# Altium PCB design2.PcbDoc
Units mil, origin at the board's own origin, x right, y up, seen from the top; angles counter-clockwise.
Board outline 866.14 x 3937.01 mil, 2 copper layers (Top Layer, Bottom Layer); 63 components, 38 nets, 188 pads, 34 vias.
Unrouted connection lines stored in the file: 83.
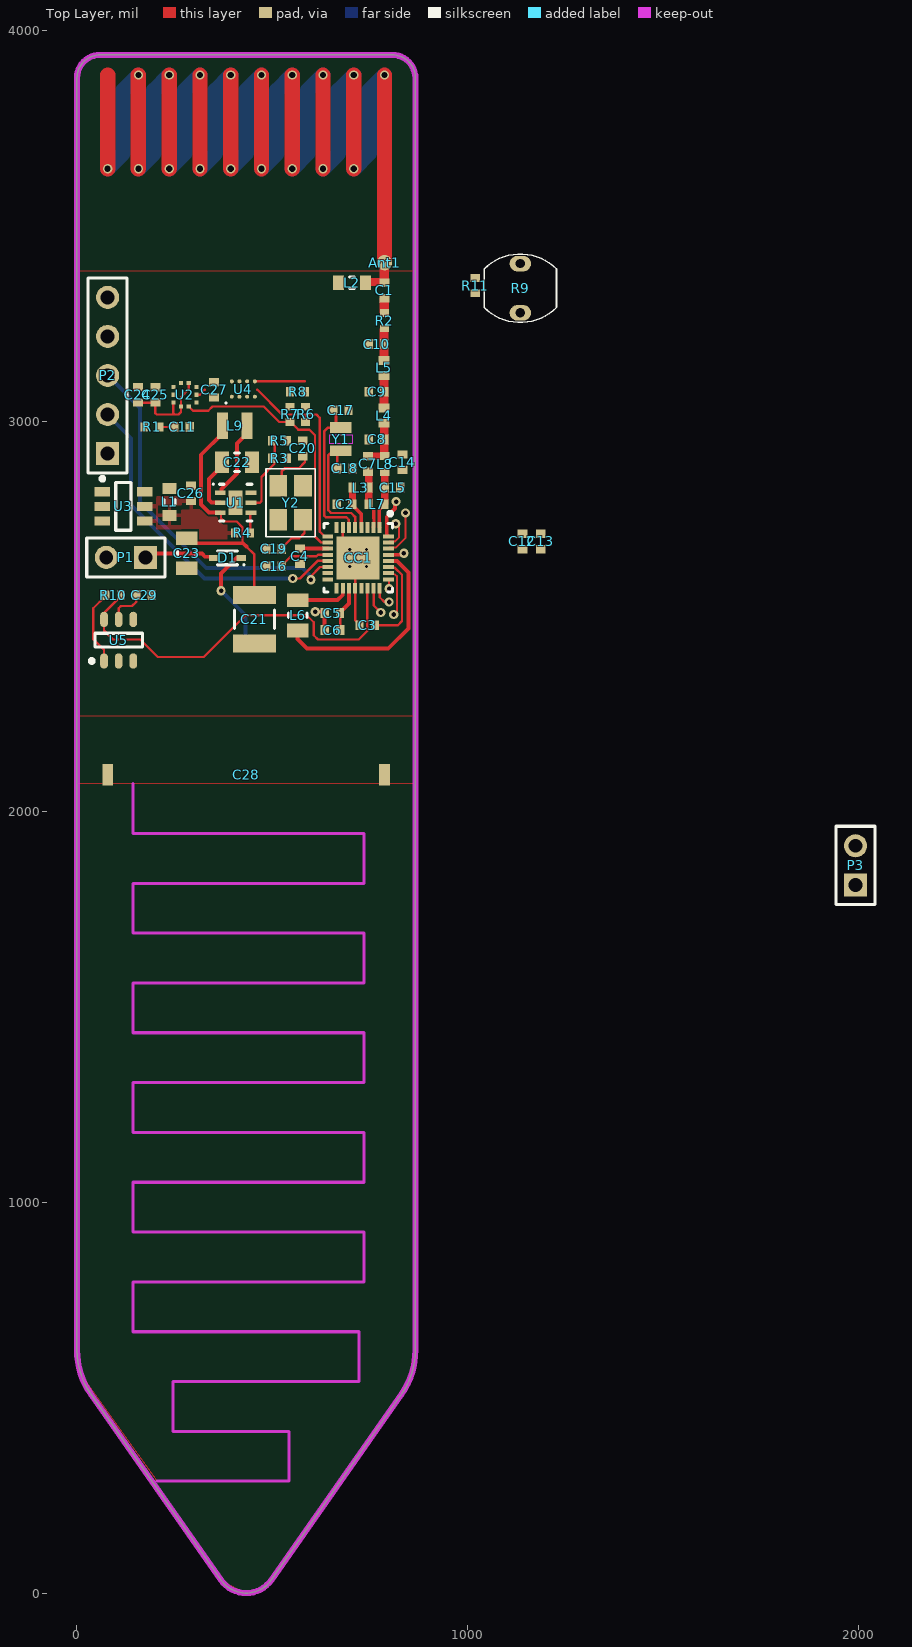
[diagram p0: Top Layer view]
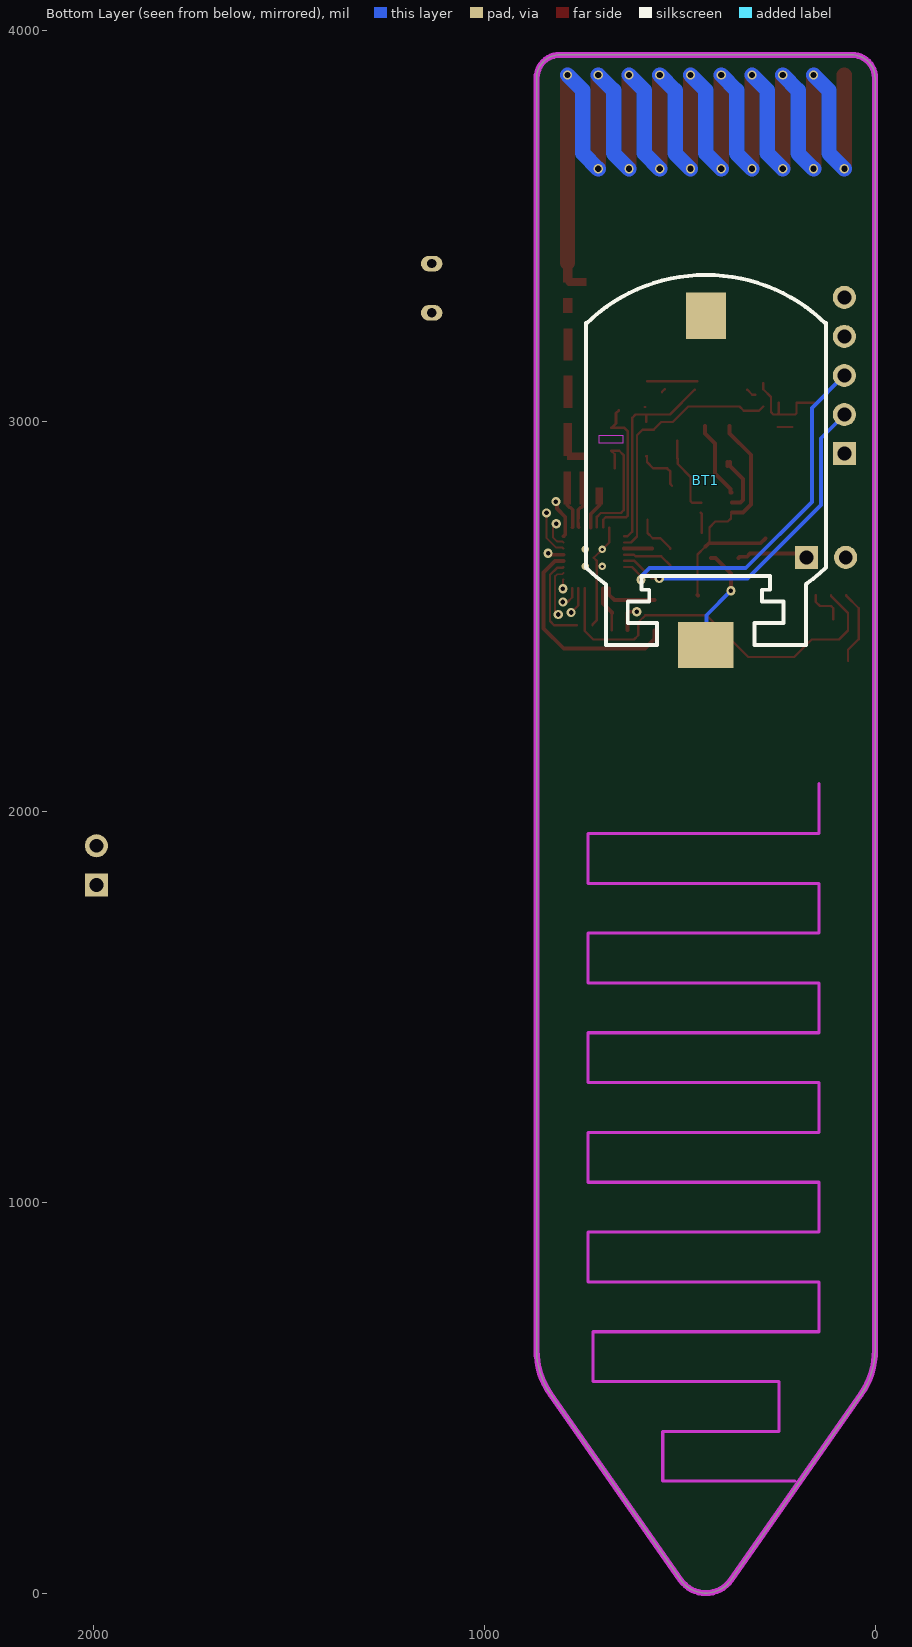
[diagram p1: Bottom Layer view, seen from below]
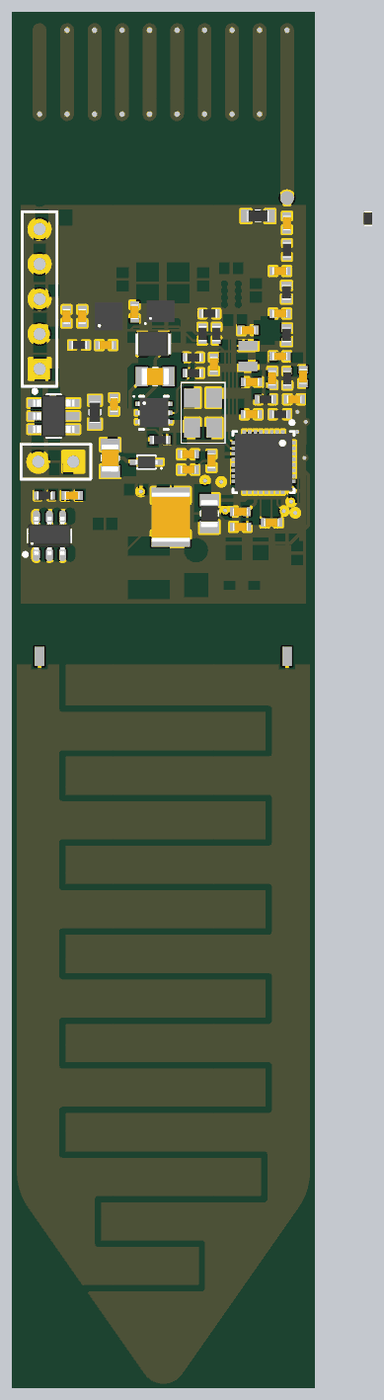
[diagram p2: 3D render of the assembled board from above, using the file's embedded part models]

## Layer stack, top to bottom
Top Solder: solder mask 0.4, Solder Resist, Dk 3.5
Top Layer: signal copper 1.4
Dielectric 1: dielectric 12.6, FR-4, Dk 4.8
Bottom Layer: signal copper 1.4
Bottom Solder: solder mask 0.4, Solder Resist, Dk 3.5

## Board outline
35.85,509.36 cw(c197.1,622.27) 0.25,622.27 0.25,3878.2 cw(c59.31,3878.2) 59.31,3937.26 807.34,3937.26 cw(c807.34,3878.2) 866.39,3878.2 866.39,622.27 cw(c669.54,622.27) 830.79,509.36 497.82,33.83 cw(c433.32,78.99) 368.82,33.83

## Design rules (kind name [scope] priority, off if disabled: settings)
Clearance [All] p1: gap=5 ignorepadtopadclearanceinfootprint=FALSE
DiffPairsRouting [All] p1: maxlimit=5 minlimit=5 mostfreqgap=5 toplayer_minwidth=8.58 toplayer_maxwidth=8.58 toplayer_prefwidth=8.58 bottomlayer_minwidth=8.58 bottomlayer_maxwidth=8.58 bottomlayer_prefwidth=8.58 maxuncoupledlength=500
Height Height_1 [InComponent('U2')] p1: minheight=0 maxheight=3937.01 prefheight=500
Height [All] p2: minheight=0 maxheight=1000 prefheight=500
HoleSize [All] p1: absolutevalues=TRUE maxlimit=100 minlimit=11.81 maxpercent=80.000 minpercent=20.000
PlaneClearance [All] p1: clearance=5
PlaneConnect [All] p1: planeconnectstyle=Direct reliefexpansion=20 reliefentries=4 reliefconductorwidth=10 reliefairgap=10
PolygonConnect [All] p1: connectstyle=Relief reliefconductorwidth=10 reliefentries=4 polygonreliefangle="90 Angle" airgapwidth=10
RoutingVias [All] p1: holewidth=15.75 width=27.56 viastyle="Through Hole" minholewidth=11.81 minwidth=23.62 maxholewidth=19.68 maxwidth=31.5
SolderMaskExpansion [All] p1: expansion=5
Width Width_50ohm [InNet('NetAnt1_1')] p1: maxlimit=39.37 minlimit=11.55 preferedwidth=11.55 minimp=50.000000 maximp=50.000000 favimp=50.000000
Width [All] p2: maxlimit=10 minlimit=5 preferedwidth=6 minimp=50.000000 maximp=50.000000 favimp=50.000000
25 further rules are at their usual default settings.

## Classes and differential pairs
differential pair RF: +RF_P -RF_N

## Components (designator, comment, footprint, x,y, rotation, side; value= is the part's Value field where it differs from the comment)
Ant1 "Antenna 868 Helix" ANTENNA_868_HELIX 787.4,3405.51 r180 top
BT1 "Battery Coin Cell" S8421-45R 433,2488.19 r180 bottom
C1 "Cap" "0402 (CAP)" 787,3334.31 r90 top value=8.2pF
C2 "Cap" "0402 (CAP)" 685,2787 r0 top value=100pF
C3 "Cap" "0402 (CAP)" 743.1,2477.5 r0 top value=100nF
C4 "Cap" "0402 (CAP)" 571,2654 r90 top value=100nF
C5 "Cap" "0402 (CAP)" 653.69,2508.52 r0 top value=22uF
C6 "Cap" "0402 (CAP)" 654,2465 r0 top value=100nF
C7 "Cap" "0402 (CAP)" 745,2890.39 r90 top value=3.6pF
C8 "Cap" "0402 (CAP)" 767,2953 r180 top value=2.7pF
C9 "Cap" "0402 (CAP)" 767,3075 r180 top value=6.2pF
C10 "Cap" "0402 (CAP)" 767,3197 r180 top value=3pF
C11 "Cap" "0402 (CAP)" 269.07,2985 r0 top value=100nF
C12 "Cap" "0402 (CAP)" 1140.3,2692.01 r270 top value=22uF
C13 "Cap" "0402 (CAP)" 1187.07,2692.01 r270 top value=100nF
C14 "Cap" "0402 (CAP)" 833.31,2895 r270 top value=100nF
C15 "Cap" "0402 (CAP)" 808,2830 r0 top value=3.6pF
C16 "Cap" "0402 (CAP)" 504.31,2628.35 r0 top value=1uF
C17 "Cap" "0402 (CAP)" 675.69,3027.55 r180 top value=12pF
C18 "Cap" "0402 (CAP)" 686,2879 r180 top value=12pF
C19 "DNM" "0402 (CAP)" 504.31,2672.62 r0 top value=12pF
C20 "DNM" "0402 (CAP)" 578,2930 r270 top value=12pF
C21 "GRM32EC70J107ME15L" "1210 (CAP)" 454.39,2492.63 r90 top value=100uF
C22 "Cap" "0805 (CAP)" 410,2895 r180 top value=22uF
C23 "Cap" "0805 (CAP)" 280.78,2661.74 r90 top value=10uF
C24 "Cap" "0402 (CAP)" 156,3067 r270 top value=100nF
C25 "Cap" "0402 (CAP)" 201,3067 r270 top value=100nF
C26 "Cap" "0402 (CAP)" 292,2815 r270 top value=1uF
C27 "Cap" "0402 (CAP)" 351,3080 r270 top value=100nF
C28 "Chumidity" SOIL_CAP 433.07,669.29 r0 top value=1pF
C29 "Cap" "0402 (CAP)" 171.88,2554.47 r180 top value=100nF
CC1 "CC1310F32RSMR" CC1310F32RSMR 720,2650 r270 top
D1 "RB751S40T5G" SOD-523 385,2650 r180 top
L1 "BLM18HE152SN1D" "0603 (IND)" 237,2793 r90 top value="1500 Ohm"
L2 "Inductor" "0603 (IND)" 704,3354 r180 top value=68nH
L3 "Inductor" "0402 (IND)" 725.57,2830 r180 top value=7.5nH
L4 "Inductor" LQW15AN6N8G00D 786,3014 r270 top value=6.8nH
L5 "Inductor" LQW15AN6N8G00D 786,3136 r270 top value=6.8nH
L6 "MLZ2012N6R8LT000" "0805 (IND)" 565,2503 r270 top value=6.8uH
L7 "Inductor" "0402 (IND)" 767,2787 r0 top value=27nH
L8 "Inductor" "0402 (IND)" 788,2890 r270 top value=7.5nH
L9 "Inductor" SRN2009T 404,2988 r0 top value=3.3uH
P1 "Header 2" HDR1X2 175.29,2651.16 r180 top
P2 "Header 5" HDR1X5 78.74,2916.71 r90 top
P3 "Header 2" HDR1X2 1993,1813 r90 top
R1 "Res1" "0402 (RES)" 192,2985 r180 top value=4.7K
R2 "DNM" "0402 (RES)" 787,3257 r270 top value=0
R3 "DNM" "0402 (RES)" 518.39,2904.79 r180 top value=0
R4 "Res1" "0402 (RES)" 423.84,2713.67 r0 top value=10K
R5 "DNM" "0402 (RES)" 518.39,2949.79 r0 top value=0
R6 "Res1" "0402 (RES)" 585.31,3017.39 r90 top value=4.7K
R7 "Res1" "0402 (RES)" 545.31,3017.39 r90 top value=4.7K
R8 "Res1" "0402 (RES)" 565,3075 r180 top value=4.7K
R9 "200K - 10K" Photoresistor 1135,3340 r90 top
R10 "Rcharge" "0402 (RES)" 93.14,2554.47 r0 top value=1k
R11 "Res1" "0402 (RES)" 1019.32,3346.65 r90 top value=4.7K
U1 "TPS61291" TPS61291 406.13,2791.16 r0 top
U2 "BMP388, Pressure sensor" BMP388 276.47,3067.31 r180 top
U3 "TPS22860" SOT23-5 119.23,2781.67 r0 top
U4 "HDC1010, Humidity, Temp" HDC1010 426,3082 r90 top
U5 "74LVC2G14, Inverting Schmitt Trigger" 74LVC2G14 106.88,2439.17 r90 top
Y1 "32.768 kHz" "FC-12M 32.7680KA-A3" 675.69,2953.84 r270 top
Y2 "TSX-3225 24.0000MF20G-AC3" "TSX-3225 24.0000MF20G-AC3" 547,2791 r90 top

## Footprints (in the part's own frame and the unit in brackets; to place one, negate y for a bottom-side part, rotate by r counter-clockwise, add the part's x,y. Pads: shape width x height; smd on the part's side, far side on the other; paste and mask are expansions set on the pad)
74LVC2G14 [mm] "TSOP, 6-Leads, Body 2,90x1,50mm, Pitch 0,95mm, IPC Medium Density"
  oval 1x0.5 smd: 1(-1.35,0.95) 2(-1.35,0) 3(-1.35,-0.95) 4(1.35,-0.95) 5(1.35,0) 6(1.35,0.95)
  silkscreen extent -1.47,-1.55 0.45,1.87, body extent -1.38,-1.55 1.38,1.55, height 1.1
"0402 (CAP)" [mm] "Chip Capacitor, 2-Leads, Body 1,60x0,80mm, IPC Medium Density"
  rect 0.54x0.64 smd: 1(-0.5,0) 2(0.5,0)
  body extent -0.55,-0.3 0.55,0.3, height 0.4
"0402 (IND)" [mm] "Chip Inductor, 2-Leads, Body 1,00x0,50mm, IPC Medium Density"
  rect 0.51x0.64 smd: 1(-0.525,0) 2(0.525,0)
  body extent -0.55,-0.3 0.55,0.3, height 0.4
"0402 (RES)" [mm] "Chip Resistor, 2-Leads, Body 1,00x0,50mm, IPC Medium Density"
  rect 0.5x0.6 smd: 1(-0.5,0) 2(0.5,0)
  body extent -0.55,-0.3 0.55,0.3, height 0.4
"0603 (IND)" [mm]
  rect 0.72x0.94 smd: 1(-0.87,0) 2(0.87,0)
  silkscreen extent -0.15,-0.37 0.15,0.37, body extent -0.8,-0.4 0.8,0.4, height 0.6
"0805 (CAP)" [mm] "Chip Capacitor, 2-Leads, Body 2,00x1,25mm, IPC Medium Density"
  rect 0.9x1.4 smd: 1(-0.975,0) 2(0.975,0)
  silkscreen extent -0.15,-0.6 0.15,0.6, body extent -1,-0.63 1,0.63, height 0.6
"0805 (IND)" [mm] "Chip Inductor, 2-Leads, Body 2,00x1,25mm, IPC Medium Density"
  rect 0.9x1.39 smd: 1(-0.98,0) 2(0.98,0)
  silkscreen extent -0.15,-0.6 0.15,0.6, body extent -1,-0.63 1,0.63, height 0.6
"1210 (CAP)" [mm] "Chip Capacitor, 2-Leads, Body 3,20x2,50mm, IPC Medium Density"
  rect 1.15x2.8 smd: 1(-1.575,0) 2(1.575,0)
  silkscreen extent -0.6,-1.3 0.6,1.3, body extent -1.8,-1.4 1.8,1.4, height 2.8
ANTENNA_868_HELIX [mm]
  round 1 smd: 1(0,0)
  Top Layer lines w1: 18,-6.1 18,-12.2 ; 16,-6.1 16,-12.2 ; 14,-6.1 14,-12.2 ; 12,-6.1 12,-12.2 ; 10,-6.1 10,-12.2 ; 8,-6.1 8,-12.2 ; 6,-6.1 6,-12.2 ; 4,-6.1 4,-12.2 ; 2,-6.1 2,-12.2 ; 0,0 0,-12.2
  Bottom Layer lines w1: 18,-6.1 17,-7.1 17,-11.2 16,-12.2 ; 16,-6.1 15,-7.1 15,-11.2 14,-12.2 ; 14,-6.1 13,-7.1 13,-11.2 12,-12.2 ; 12,-6.1 11,-7.1 11,-11.2 10,-12.2 ; 10,-6.1 9,-7.1 9,-11.2 8,-12.2 ; 8,-6.1 7,-7.1 7,-11.2 6,-12.2 ; 6,-6.1 5,-7.1 5,-11.2 4,-12.2 ; 4,-6.1 3,-7.1 3,-11.2 2,-12.2 ; 2,-6.1 1,-7.1 1,-11.2 0,-12.2
BMP388 [mm] "LGA, 10-Leads, Body 2,00x2,00mmx0,80mm, Pitch 0,50mm"
  rect 0.275x0.275 smd: 1(0.25,0.762) 2(-0.25,0.762) 3(-0.75,0.5) 4(-0.75,0) 5(-0.75,-0.5) 6(-0.25,-0.763) 7(0.25,-0.763) 8(0.75,-0.5) 9(0.75,0) 10(0.75,0.5)
  body extent -1.02,-1.03 1.65,1.02, height 30
CC1310F32RSMR [mm] "QFN, 32-Leads, Body 4,00x4,00mm, Pitch 0,40mm, Thermal Pad 2,80x2,80mm, IPC Medium Density"
  rect 0.7x0.26 smd: 1(-1.975,1.4) 2(-1.975,1) 3(-1.975,0.6) 4(-1.975,0.2) 5(-1.975,-0.2) 6(-1.975,-0.6) 7(-1.975,-1) 8(-1.975,-1.4) 17(1.975,-1.4) 18(1.975,-1) 19(1.975,-0.6) 20(1.975,-0.2) 21(1.975,0.2) 22(1.975,0.6) 23(1.975,1) 24(1.975,1.4)
  rect 0.26x0.7 smd: 9(-1.4,-1.975) 10(-1,-1.975) 11(-0.6,-1.975) 12(-0.2,-1.975) 13(0.2,-1.975) 14(0.6,-1.975) 15(1,-1.975) 16(1.4,-1.975) 25(1.4,1.975) 26(1,1.975) 27(0.6,1.975) 28(0.2,1.975) 29(-0.2,1.975) 30(-0.6,1.975) 31(-1,1.975) 32(-1.4,1.975)
  rect 2.8x2.8 smd: 33(0,0)
  silkscreen extent -3,-2.22 2.22,2.22, body extent -2.08,-2.08 2.08,2.08, height 1
"FC-12M 32.7680KA-A3" [mm]
  rect 0.7x1.4 smd: 1(-0.75,0) 2(0.75,0)
  Keep-Out Layer region: -0.254,-0.762 0.254,-0.762 0.254,0.762 -0.254,0.762
HDC1010 [mm] "BGA, 8-Leads, Body 1,59x2,04mmx0,68mm, Pitch 0,50mm"
  round 0.26 smd: A1(-0.5,0.75) A2(0.5,0.75) B1(-0.5,0.25) B2(0.5,0.25) C1(-0.5,-0.25) C2(0.5,-0.25) D1(-0.5,-0.75) D2(0.5,-0.75)
  silkscreen extent -0.95,1.08 -0.85,1.17, body extent -0.79,-1.02 0.79,1.02, height 0.67
HDR1X2 [mm] "Connector; Header; 2 Position"
  rect 1.5x1.5 hole 0.9: 1(0,0)
  round 1.5 hole 0.9: 2(2.54,0)
  silkscreen extent -1.27,-1.27 3.81,1.27
HDR1X5 [mm] "Connector; Header; 5 Position"
  rect 1.5x1.5 hole 0.9: 1(0,0)
  round 1.5 hole 0.9: 2(2.54,0) 3(5.08,0) 4(7.62,0) 5(10.16,0)
  silkscreen extent -1.27,-1.27 11.43,1.27
LQW15AN6N8G00D [mm] "Chip Inductor, 2-Leads, Body 1,00x0,60mm, IPC Medium Density"
  rect 0.58x0.74 smd: 1(-0.49,0) 2(0.49,0)
  body extent -0.55,-0.35 0.55,0.35, height 0.5
Photoresistor [mm]
  oval 1x1.4 hole 0.6: 1(-1.6,0) 2(1.6,0)
  silkscreen extent -2.22,-2.35 2.22,2.35
S8421-45R [mm]
  rect 3.6x3 smd: 1(0,-1.556)
  rect 2.6x3 smd: 2(0,19.844)
  silkscreen extent -7.8,-1.56 7.8,22.5
SOD-523 [mm] "Molded Diode, 2-Leads, Body 1,20x0,80mm, IPC Medium Density"
  rect 0.6x0.4 smd: 1(-0.9,0) 2(0.9,0)
  silkscreen extent -1.12,-0.45 0.65,0.5, body extent -0.87,-0.45 0.87,0.45, height 0.7
SOIL_CAP [mm]
  rect 0.7x1.4 smd: 1(-9,36.2) 2(9,36.2)
  Keep-Out Layer lines w0.2: -7.339,35.628 -7.339,32.389 7.661,32.389 7.661,29.15 -7.339,29.15 -7.339,25.911 7.661,25.911 7.661,22.672 -7.339,22.672 -7.339,19.434 7.661,19.434 7.661,16.195 -7.339,16.195 -7.339,12.956 7.661,12.956 7.661,9.717 -7.339,9.717 -7.339,6.478 7.661,6.478 7.661,3.239 -7.339,3.239 -7.339,0 7.339,0 7.339,-3.239 -4.749,-3.239 -4.749,-6.478 2.803,-6.478 2.803,-9.717 -5.777,-9.717
SOT23-5 [mm] "SOT23, 5-Leads, Body 2,90x2,80mm, Pitch 0,95mm, IPC Medium Density"
  rect 1x0.6 smd: 1(-1.375,0.95) 2(-1.375,0) 3(-1.375,-0.95) 4(1.375,-0.95) 5(1.375,0) 6(1.375,0.95)
  silkscreen extent -1.5,-1.55 0.5,1.92, body extent -1.5,-1.53 1.5,1.53, height 1.45
SRN2009T [mm] "Molded Inductor, 2-Leads, Body 2,00x1,60mm, IPC Medium Density"
  rect 0.7x1.7 smd: 1(-0.8,0) 2(0.8,0)
  body extent -1.32,-0.9 1.32,0.9, height 0.95
TPS61291 [mm] "SON, 6-Leads, Body 2,00x2,00mm, Pitch 0,65mm, Thermal Pad 1,60x0,89mm, IPC Medium Density"
  rect 0.7x0.3 smd: 1(-0.995,0.65) 2(-0.995,0) 3(-0.995,-0.65) 4(0.995,-0.65) 5(0.995,0) 6(0.995,0.65)
  rect 0.89x1.6 smd: 7(0,0)
  silkscreen extent -1.5,-1.2 1.05,1.25, body extent -1.13,-1.05 1.13,1.05, height 0.8
"TSX-3225 24.0000MF20G-AC3" [mm]
  rect 1.4x1.15 smd: 1(-1.1,-0.8) 2(1.1,-0.8) 3(1.1,0.8) 4(-1.1,0.8)
  silkscreen extent -2.2,-1.6 2.2,1.6

## Part data
C1 C2 C3 C4 C5 C6 C7 C8 C9 C10 C11 C12 C13 C14 C15 C16 C17 C18 C22 C23 C24 C25 C26 C27 C29: "Capacitor", LatestRevisionDate=17-Jul-2002, LatestRevisionNote="Re-released for DXP Platform.", PackageDescription="Radial Cap, Thru-Hole; 2 Leads; 0.3 in Pin Spacing", PackageReference=RAD-0.3, Published=8-Jun-2000, Publisher="Altium Limited"
C19 C20 C21 C28: library part Cap, "Capacitor", LatestRevisionDate=17-Jul-2002, LatestRevisionNote="Re-released for DXP Platform.", PackageDescription="Radial Cap, Thru-Hole; 2 Leads; 0.3 in Pin Spacing", PackageReference=RAD-0.3, Published=8-Jun-2000, Publisher="Altium Limited"
D1: library part "D Schottky", "Schottky Diode", Code_JEDEC=DO-214-AA, LatestRevisionDate=17-Jul-2002, LatestRevisionNote="Re-released for DXP Platform.", PackageDescription="DO-214-AA/SMB; 2 C-Bend Leads; Body 5.3 x 3.6 mm, inc. leads (LxW)", PackageReference=SMB, Published=8-Jun-2000, Publisher="Altium Limited"
L1: library part "Inductor Iron", "Magnetic-Core Inductor", LatestRevisionDate=17-Jul-2002, LatestRevisionNote="Re-released for DXP Platform.", PackageDescription="Axial Device, Thru-Hole; 2 Leads; 0.9 in Pin Spacing", PackageReference=AXIAL-0.9, Published=24-Mar-1999, Publisher="Altium Limited"
L6: library part Inductor, "Inductor", Code_IEC=1005, Code_JEITA=0402, LatestRevisionDate=29-May-2009, LatestRevisionNote="IPC-7351 Footprint Added.", PackageDescription="Chip Inductor", PackageReference=0402-A, Published=8-Jun-2000, Publisher="Altium Limited"
P1 P3: "Header, 2-Pin", LatestRevisionDate=17-Jul-2002, LatestRevisionNote="Re-released for DXP Platform.", Publisher="Altium Limited"
P2: "Header, 5-Pin", LatestRevisionDate=17-Jul-2002, LatestRevisionNote="Re-released for DXP Platform.", Publisher="Altium Limited"
R1 R4 R6 R7 R8 R11: "Resistor", LatestRevisionDate=17-Jul-2002, LatestRevisionNote="Re-released for DXP Platform.", PackageDescription="Axial Device, Thru-Hole; 2 Leads; 0.3 in Pin Spacing", PackageReference=AXIAL-0.3, Published=8-Jun-2000, Publisher="Altium Limited"
R2 R3 R5 R10: library part Res1, "Resistor", LatestRevisionDate=17-Jul-2002, LatestRevisionNote="Re-released for DXP Platform.", PackageDescription="Axial Device, Thru-Hole; 2 Leads; 0.3 in Pin Spacing", PackageReference=AXIAL-0.3, Published=8-Jun-2000, Publisher="Altium Limited"
R9: library part "Photo Resistor"
U2: library part BMP388
U4: library part HDC1010
U5: library part 74LVC2G14
Y1: library part XTAL, "Crystal Oscillator", LatestRevisionDate=17-Jul-2002, LatestRevisionNote="Re-released for DXP Platform.", PackageDescription="Crystal, Thru-Hole; 2 Leads; Body 3.1 x 8.2 mm (Dia.xH)", PackageReference=R38, Published=8-Jun-2000, Publisher="Altium Limited"
Y2: library part Crystal
L2 L3 L4 L5 L7 L8 L9: Code_IEC=1005, Code_JEITA=0402, LatestRevisionDate=29-May-2009, LatestRevisionNote="IPC-7351 Footprint Added.", PackageDescription="Chip Inductor", PackageReference=0402-A, Published=8-Jun-2000, Publisher="Altium Limited"

## Via types
v1: diameter 23.62, hole 15.75, Top Layer to Bottom Layer, tented both sides, 18 vias
v2: diameter 23.62, hole 11.81, Top Layer to Bottom Layer, 8 vias
v3: diameter 23.62, hole 11.81, Top Layer to Bottom Layer, tented both sides, 4 vias
v4: diameter 19.68, hole 7.87, Top Layer to Bottom Layer, 4 vias

## Nets (pads, with @x,y where several pads share a name; then routed paths per layer and width w, separated by ;. In a path a pad name is that pad's centre, name@x,y a point inside that pad or via, vN(x,y) a via of type N, cw(c..) or ccw(c..) an arc to the next point about the centre after c; other vN are vias at no path point)
BMP_INT: U2.7
DCDC_SW: CC1.18 L6.1 | length 138.5
  Top Layer w10: L6.1 667.26,2541.58 680.51,2554.83 680.51,2572.13 CC1.18
DRDYn: CC1.16 R8.2 U4.D2 | length 139.5
  Top Layer w6: U4.D2 583.4,3101.69 ; R8.2@538.47,3081.84 R8.2 R8.2@545.31,3073.03
EN_BYP: CC1.23 R4.2 U1.4 | length 122.3
  Top Layer w6: R4.2 443.66,2713.8 443.66,2762.66 U1.4@446,2765 ; CC1.23 759.37,2528.63 v2(778,2510)
GND: BT1.2 C2.1 C3.1 C4.1 C5.1 C6.1 C8.2 C9.2 C10.2 C11.2 C12.1 C13.1 C14.1 C15.2 C16.1 C17.1 C18.1 C19.1 C20.1 C21.1 C22.1 C23.1 C24.1 C25.1 C26.1 C27.1 C28.2 C29.1 CC1.3 CC1.7 CC1.17 CC1.20 CC1.29 CC1.33 L2.2 P2.5 R5.2 R11.1 U1.6 U1.7 U2.3 U2.5 U2.8 U2.9 U3.2 U4.B2 U4.C1 U4.D1 U5.2 Y2.2 Y2.4 | length 384.5
  Top Layer w6: CC1.7 680.63,2689.37 v4(698.35,2671.65) CC1.33 712.13,2642.13 CC1.20 712.13,2490.76 723.42,2479.47 C3.1
  Top Layer w10: v2(610,2512) 630.52,2512 C5.1 634.16,2508.36 634.16,2465.16 C6.1 ; CC1.29 829.19,2657.87 833.31,2662 v3(837,2662)
  other v4: 698.35,2628.35 741.65,2628.35 741.65,2671.65
JTAG_TCK: CC1.14 P2.3 | length 945
  Top Layer w6: v2(599,2593.64) 599,2603.07 622.31,2626.38 CC1.14
  Bottom Layer w10: P2.3@78,3115 80.45,3115 162,3033.45 162,2793 331,2624 577,2624 599,2602 v2(599,2593.64)
JTAG_TMS: CC1.13 P2.2 | length 855.7
  Top Layer w6: v2(552.69,2597) 571,2597 616.13,2642.13 CC1.13
  Bottom Layer w10: P2.2@79,3016 139,2956 139,2785 327,2597 v2(552.69,2597)
NetAnt1_1: Ant1.1 C1.2 L2.1 | length 0.6
  Top Layer w11.55: C1.2 C1.2@787.2,3354.2 ; Ant1.1@787.2,3405.31 Ant1.1
  other v1: 78.74,3645.67 157.48,3645.67 236.22,3645.67 314.96,3645.67 393.7,3645.67 472.44,3645.67 551.18,3645.67 629.92,3645.67 708.66,3645.67 157.48,3885.83 236.22,3885.83 314.96,3885.83 393.7,3885.83 472.44,3885.83 551.18,3885.83 629.92,3885.83 708.66,3885.83 787.4,3885.83
NetBT1_1: BT1.1 D1.1 | length 280.1
  Top Layer w10: v2(369,2566) 369,2610 409,2650 D1.1
  Bottom Layer w10: v2(369,2566) 432,2503 BT1.1@432,2424
NetC1_1: C1.1 R2.1
NetC2_2: C2.2 CC1.4 L3.2 | length 68.8
  Top Layer w10: C2.2 704.69,2785.03 727.87,2761.84 CC1.4
NetC7_2: C7.2 C8.1 L4.2 L8.1
NetC9_1: C9.1 L4.1 L5.2
NetC10_1: C10.1 L5.1 R2.2
NetC16_2: C16.2 CC1.12 | length 131.6
  Top Layer w6: C16.2 524,2630.32 547.68,2654 613.13,2654 617,2657.87 CC1.12
NetC17_2: C17.2 CC1.6 Y1.1 | length 401.4
  Top Layer w6: Y1.1 673.42,2983.36 642.66,2983.36 632.69,2973.39 632.69,2758.36 637.29,2753.75 689.94,2753.75 696,2747.69 696,2728.13 CC1.6
  Top Layer w7: C17.2 663.14,3020.42 663.14,2993.64 Y1.1@673.42,2983.36
NetC18_2: C18.2 CC1.5 Y1.2 | length 329.7
  Top Layer w6: C18.2 666.31,2914.93 Y1.2 654.97,2924.31 643.69,2913.02 643.69,2771.73 650.66,2764.75 702.27,2764.75 712.13,2754.89 CC1.5
NetC19_2: C19.2 CC1.31 Y2.1 | length 180.9
  Top Layer w5: CC1.31 800.37,2691.99 814.13,2691.99 814.64,2692.5 824,2701.86 824,2729 v3(816,2737)
  Top Layer w6: C19.2 524,2674.59 549.54,2700.13 569.14,2700.13 582.68,2713.67 Y2.1@582.68,2747.85
NetC20_2: C20.2 CC1.30 Y2.3 | length 244.2
  Top Layer w5: CC1.30 800.37,2676.24 816.65,2676.24 841,2700.59 v3(841,2765)
  Top Layer w6: Y2.3@519.68,2834.46 524,2838.78 524,2870.71 532.29,2879 568,2879 584,2895 C20.2@584,2910.28 ; C20.2@584.03,2910.31 C20.2@586,2910.31
NetC28_1: C28.1 R10.1 U5.1 | length 192.9
  Top Layer w6: U5.1 69.29,2386.21 69.29,2414.71 42,2442 42,2521.04 73.46,2552.5 R10.1
NetCC1_24: CC1.24 R9.2 R11.2 | length 52
  Top Layer w6: CC1.24 775.12,2549.1 787.22,2537 v2(799,2537)
NetD1_2: D1.2 P1.1 | length 181.3
  Top Layer w10: P1.1@177,2651 187,2661 320,2661 328.13,2652.87 346.69,2652.87 D1.2
NetL9_2: L9.2 U1.1 | length 200.8
  Top Layer w10: U1.1 368.94,2816.75 369.84,2817.65 369.84,2825.84 410,2866 410,2942.82 435.5,2968.32 L9.2
NetR3_2: R3.2 R5.1 U1.5 | length 197.5
  Top Layer w6: U1.5 468.28,2791.16 472.44,2795.31 472.44,2857.14 505.26,2889.96 505.26,2903.35 506.7,2904.79 R5.1@506.7,2949.79
PWR_ON: CC1.15 U3.6
RESET_N: C11.1 CC1.21 P2.4 R1.1 | length 37.7
  Top Layer w6: R1.1 C11.1
RF_N: C7.1 CC1.2 L3.1 L7.1 | length 67.1
  Top Layer w8.58: L7.1 746.33,2784.44 752.08,2778.69 755.18,2778.69 760.21,2773.67 760.21,2751.07 760.45,2750.83 760.45,2739.16 760.2,2738.9 760.2,2729.58 CC1.2@758.87,2728.25
RF_P: C15.1 CC1.1 L7.2 L8.2 | length 67.4
  Top Layer w8.58: CC1.1 774.29,2728.58 774.29,2738.9 774.03,2739.16 774.03,2756.45 773.79,2756.69 773.79,2773.67 778.82,2778.69 781.92,2778.69 787.67,2784.44 L7.2
SCL: CC1.10 R7.1 U2.2 U4.A1 | length 660.8
  Top Layer w6: U2.2 297,3026.61 336.02,3026.61 346.71,3037.3 396.47,3037.3 478.12,3037.3 517.7,2997.71 R7.1 547.28,2997.71 566.98,2978 595.25,2978 609.57,2963.69 609.57,2704.43 624.63,2689.37 CC1.10
SDA: CC1.9 R6.1 U2.4 U4.A2 | length 550
  Top Layer w6: U2.4 314.26,3067.31 326.94,3080 ; 461.94,3080 525.23,3016.71 584,3016.71 ; R6.1 585.31,3016.71 613.13,3016.71 621.69,3008.15 621.69,2717.02 633.58,2705.12 CC1.9
SOIL_HUMIDITY: CC1.22 R10.2 U5.6 | length 1018.5
  Top Layer w6: R10.2 112.83,2552.5 69.48,2509.15 U5.6 69.48,2463.62 92.1,2441 161.94,2441 206.94,2396 324.63,2396 431.63,2503 588,2503 606,2485 606,2452 617,2441 721.46,2441 743.1,2462.64 743.1,2571.73 CC1.22
UART_RX: CC1.26 P3.2 | length 125.8
  Top Layer w5: CC1.26 800.37,2608.01 814.13,2608.01 819.04,2603.11 819.04,2513.04 v2(811,2505)
UART_TX: CC1.25 P3.1 | length 24.4
  Top Layer w5: CC1.25 799,2593.64 v2(799,2571)
V_switch: C24.2 C25.2 C27.2 C29.2 R6.2 R7.2 R8.1 R9.1 U2.1 U2.6 U2.10 U3.1 U4.B1 U5.5 | length 356.8
  Top Layer w6: U5.5 107.19,2492.63 107.19,2521.01 112.83,2526.65 122.65,2526.65 122.69,2526.69 141.25,2526.69 152.2,2537.64 C29.2 ; C24.2 C25.2 201,3020.22 204.51,3016.71 250.46,3016.71 ; U2.10 246.94,3020.22 250.46,3016.71 ; U2.6 286.31,3081.48 266.63,3061.79 U2.1 266.63,3022.88 260.46,3016.71 250.46,3016.71 ; R6.2@588.31,3036.08 R6.2@590.28,3036.08 ; R9.1 R9.1@1135.54,3277.01
Vbat: C21.2 C23.2 CC1.8 L9.1 P1.2 U1.3 | length 692.2
  Top Layer w6: U1.3@369,2760 369,2751 377,2743 409,2743 424,2728 424,2689 425.59,2687.41 ; 434.5,2678.5 454.39,2658.61 C21.2
  Top Layer w10: C23.2@281,2700 293.59,2687.41 425.59,2687.41 434.5,2678.5 ; U1.3 338.43,2765.57 318,2786 318,2913.81 372.5,2968.32 L9.1 ; C21.2@453.75,2554 C21.2
VCC: C22.2 C26.2 L1.1 R3.1 R4.1 U1.2 U3.4 U3.5 | length 152.3
  Top Layer w10: U1.2 366.05,2792.06 344.29,2792.06 338,2798.35 338,2851.54 371.61,2885.16 C22.2 ; C22.2@377.61,2885.16 C22.2@377.61,2895
VDDR: C12.2 C13.2 C14.2 CC1.28 CC1.32 L6.2 | length 642.1
  Top Layer w10: L6.2 565,2442 589,2418 796.99,2418 848.52,2469.53 848.52,2610.63 ; CC1.28 797.87,2642.01 818.99,2642.01 848.5,2612.5 ; CC1.32 793,2709.87 793,2754.85 814.39,2776.24 814.39,2791.39 v3(817,2794)
VDDS: C3.2 C4.2 C5.2 C6.2 CC1.11 CC1.19 CC1.27 L1.2 P2.1 R1.2 | length 422.8
  Top Layer w6: C5.2 673.69,2508.2 C6.2 ; C3.2 821.5,2477.5 832,2488 832,2606.6 814.34,2624.26 799.87,2624.26 CC1.27
  Top Layer w10: C4.2 CC1.11@642.21,2673.65 ; C5.2 673.37,2510.48 696.38,2533.49 CC1.19
pads on no net: U3.3 U4.C2 U5.3 U5.4

## Polygon pours and split planes (outlines as drawn)
VCC on Top Layer "Top Layer-No Net 1" (solid, pour order 8): 154,2723 267,2723 304,2686 436,2686 436,2808 154,2808
no net on Top Layer "Top Layer-No Net" (solid, shelved, pour order 6): 0,3385 866.39,3385 866.39,2245 0,2245
GND on Top Layer "Top Layer-GND" (solid, shelved, pour order 4): 866.39,2071.98 144.13,2071.98 144.13,1944.46 734.69,1944.46 734.69,1816.94 144.13,1816.94 144.13,1689.43 734.69,1689.43 734.69,1561.91 144.13,1561.91 144.13,1434.39 734.69,1434.39 734.69,1306.88 144.13,1306.88 144.13,1179.36 734.69,1179.36 734.69,1051.84 144.13,1051.84 144.13,924.33 734.69,924.33 734.69,796.81 144.13,796.81 144.13,669.29 722.01,669.29 722.01,541.77 246.1,541.77 246.1,414.26 543.43,414.26 543.43,286.74 191.73,286.74 368.82,33.83 433.07,0.25 484.05,18.77 846.6,536.25 866.39,622.27
NetC28_1 on Top Layer "Top Layer-NetC28_1" (solid, shelved, pour order 2): 734.69,1944.46 144.13,1944.46 144.13,2071.98 0,2071.98 0,574 205.62,286.74 543.43,286.74 543.43,414.26 246.1,414.26 246.1,541.77 722.01,541.77 722.01,669.29 144.13,669.29 144.13,796.81 734.69,796.81 734.69,924.33 144.13,924.33 144.13,1051.84 734.69,1051.84 734.69,1179.36 144.13,1179.36 144.13,1306.88 734.69,1306.88 734.69,1434.39 144.13,1434.39 144.13,1561.91 734.69,1561.91 734.69,1689.43 144.13,1689.43 144.13,1816.94 734.69,1816.94

## Keep-outs
Keep-Out Layer:
  lines w15.75: 0,624 0,3879.94 ; 0.25,622.27 ccw(c197.1,622.27) 35.85,509.36 368.82,33.83 ccw(c433.32,78.99) 497.82,33.83 830.79,509.36 ccw(c669.54,622.27) 866.39,622.27 866.39,3878.2 ccw(c807.34,3878.2) 807.34,3937.26 ; 0.25,3878.2 cw(c59.31,3878.2) 59.31,3937.26 ; 59.31,3937.26 807.34,3937.26 ; 59.31,3937.26 59.31,3937.26 ; 807.34,3937.26 807.34,3937.26

## Other copper
Top Layer:
  rectangle net NetC2_2: 696,2787 715,2830
  rectangle net RF_N: 737,2787 756,2830
  rectangle net RF_N: 737,2830 756,2870.71
  rectangle net RF_P: 778.24,2787 797,2830
  rectangle net RF_P: 778.24,2830 798,2870.71
  rectangle net NetC7_2: 745,2901 788,2920
  rectangle net NetC7_2: 776,2910.67 797,2953
  rectangle net NetC7_2: 776,2953 797,2994.71
  rectangle net NetC9_1: 775.12,3033.29 797.76,3075
  rectangle net NetC9_1: 775.12,3075 797.76,3116.71
  rectangle net NetC10_1: 775.12,3155.29 797.76,3197
  rectangle net NetC10_1: 775.12,3197 797.76,3237.31
  rectangle net NetC1_1: 775.12,3276.68 799,3314.63
  rectangle net NetAnt1_1: 738.25,3346 787.4,3366.34
  rectangle net NetAnt1_1: 775.12,3354.2 799,3402.99

## Silkscreen, mask and mechanical layers (free items; w line width, h text height)
Mechanical 1:
  the board outline again, w0.5